# Altium PCB MICROPRESSURE.PcbDoc (part 1 of 2)
Units mm, origin at the board's own origin, x right, y up, seen from the top; angles counter-clockwise.
Board outline 100.09 x 99.96 mm, 2 copper layers (Top Layer, Bottom Layer), stack 1.58 mm thick; 120 components, 61 nets, 315 pads, 444 vias.
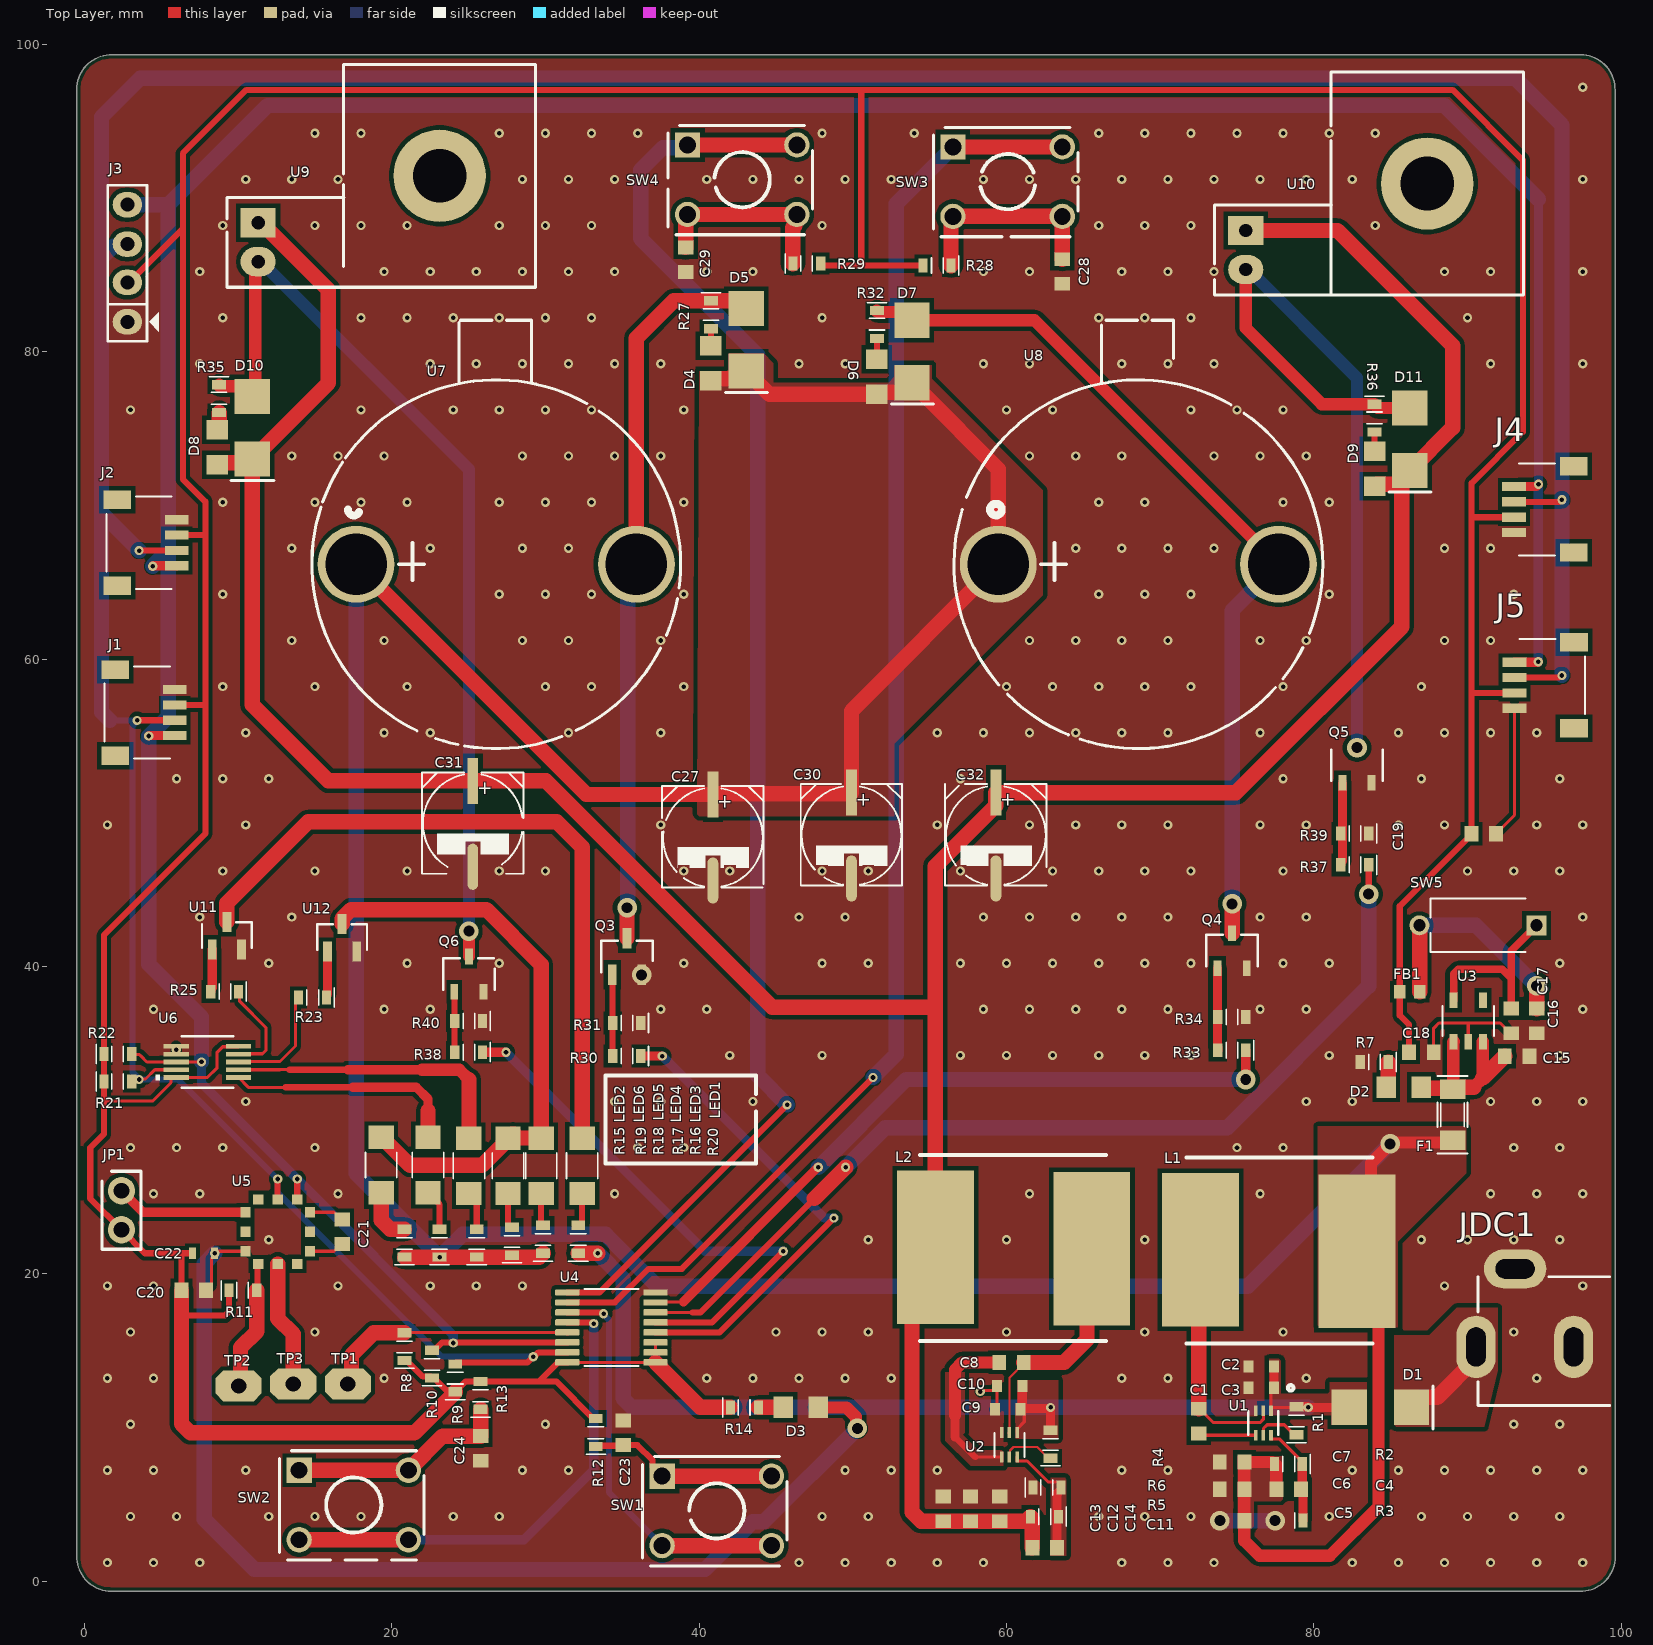
[diagram p0: Top Layer view]
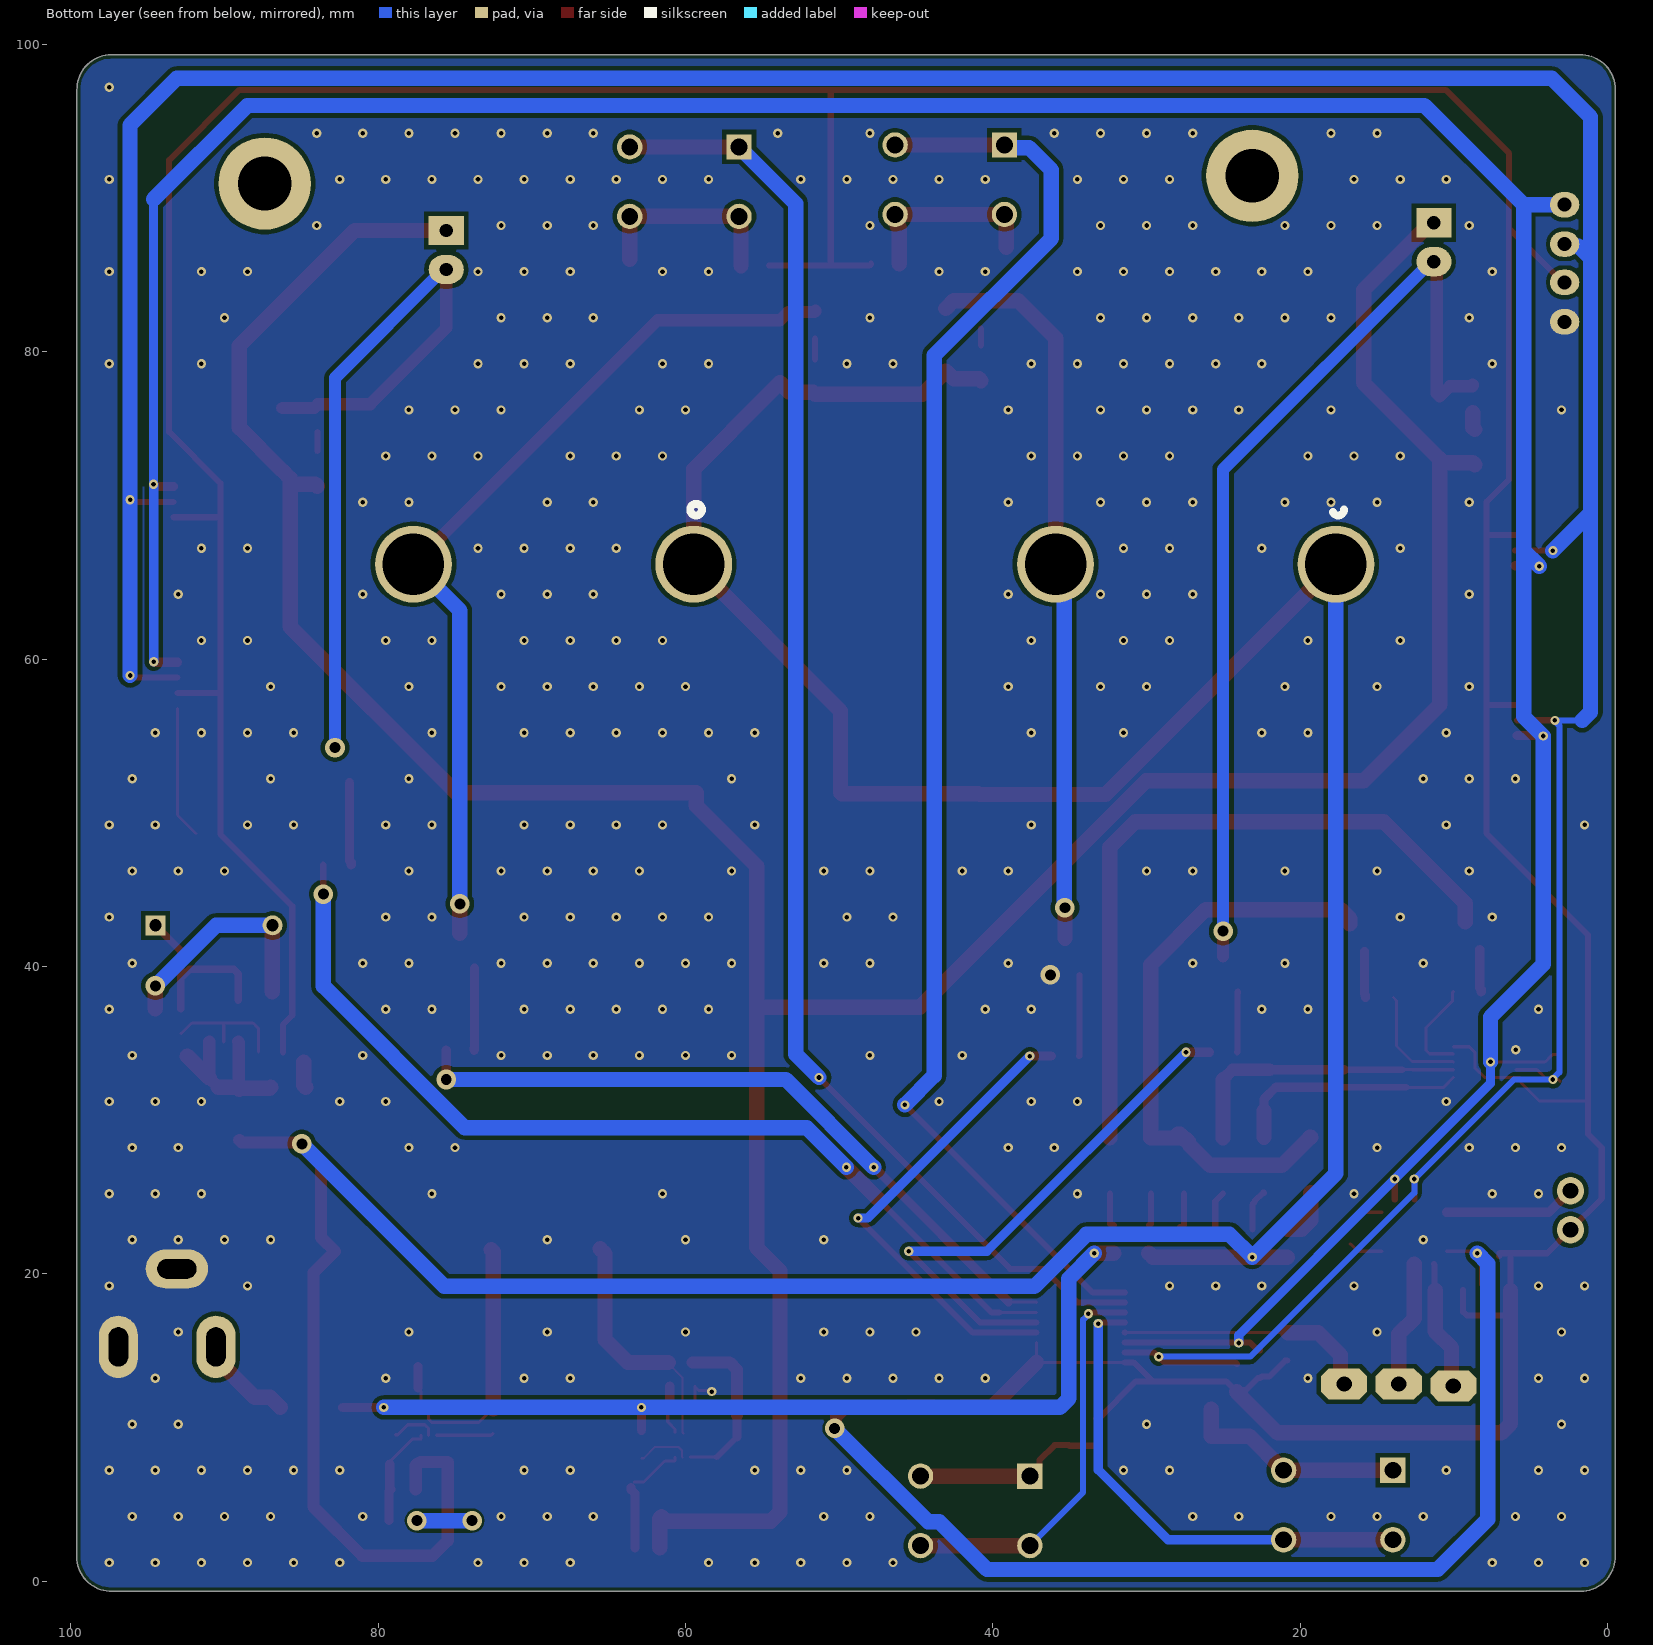
[diagram p1: Bottom Layer view, seen from below]
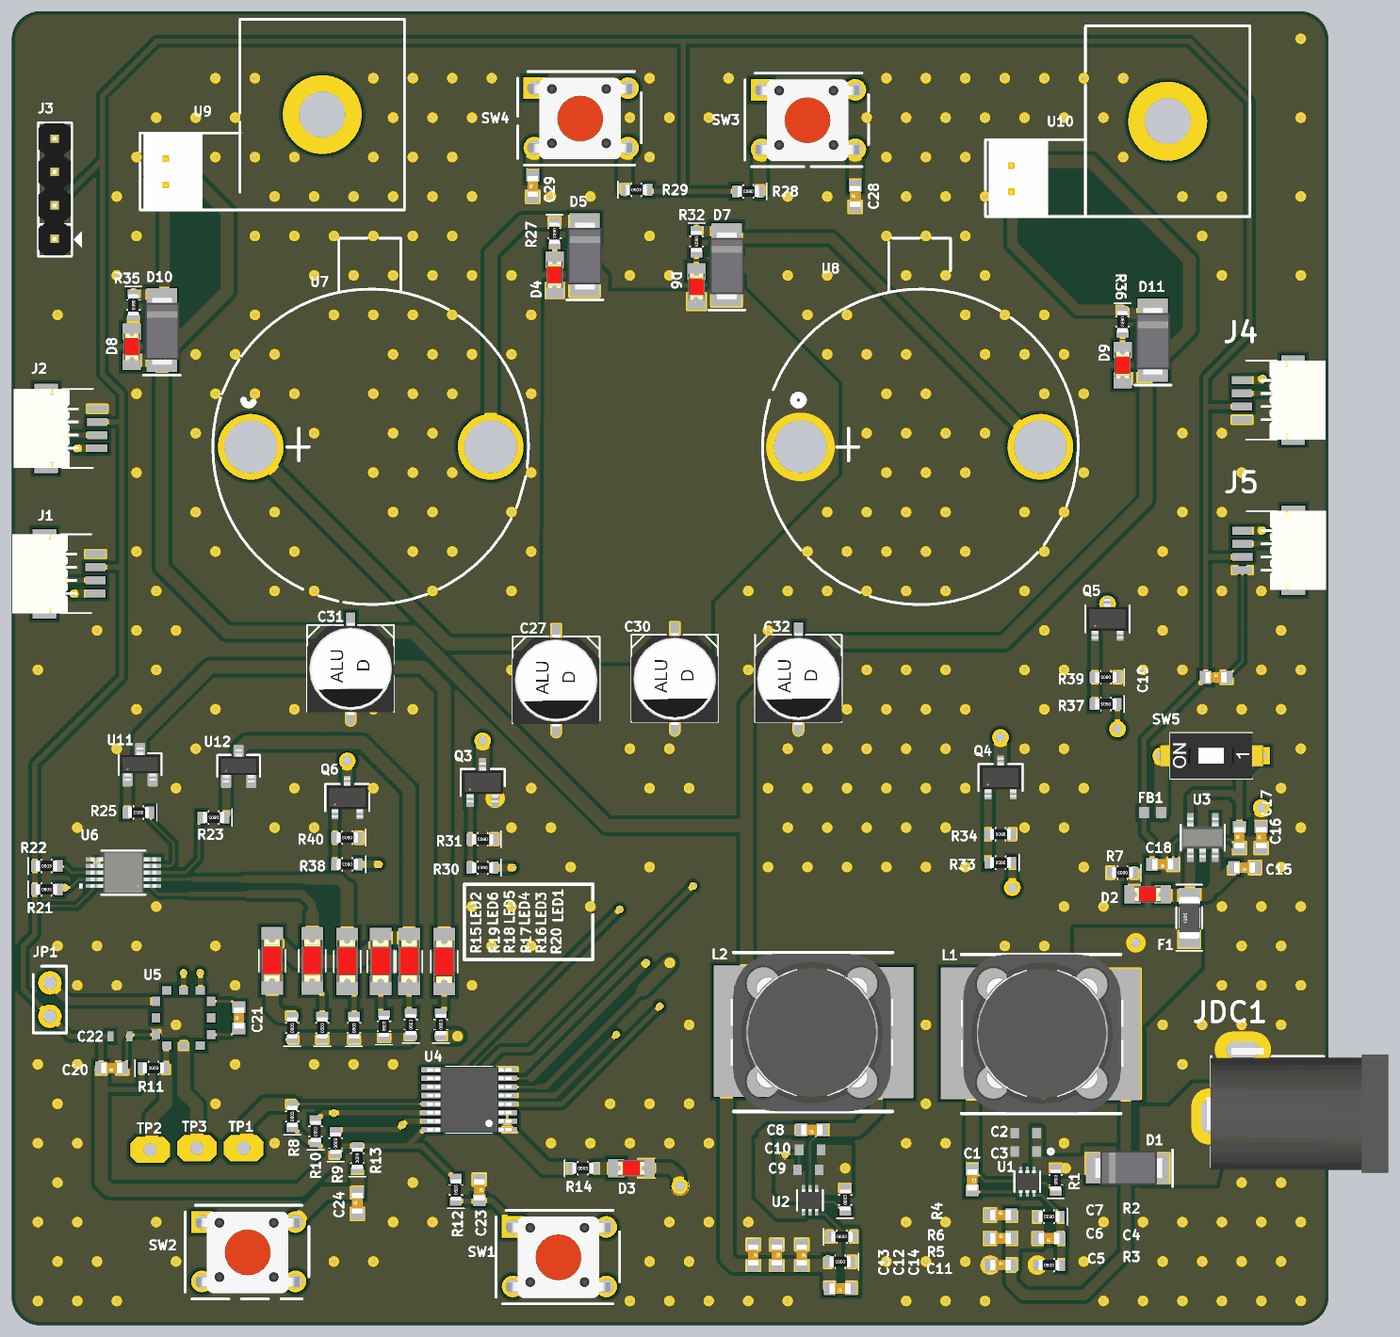
[diagram p2: 3D render of the assembled board from above, using the file's embedded part models]

## Layer stack, top to bottom
Top Solder: solder mask 0.01, SM-001, Dk 4
Top Layer: signal copper 0.035
Dielectric 1: dielectric 1.51, FR-4, Dk 4.8
Bottom Layer: signal copper 0.035
Bottom Solder: solder mask 0.01, SM-001, Dk 4

## Board outline
-0.491,1.639 -0.484,96.889 cw(c1.738,97.08) 1.802,99.309 1.809,99.302 97.172,99.302 cw(c97.362,97.08) 99.592,97.016 99.592,1.766 cw(c97.369,1.576) 97.306,-0.654 97.299,-0.647 1.929,-0.647 cw(c1.738,1.576)

## Design rules (kind name [scope] priority, off if disabled: settings)
BoardOutlineClearance [All] p1: gap=0.25 ignorepadtopadclearanceinfootprint=FALSE
Clearance "Stitching GND" [IsStitchingVia and InNet('GND') vs (IsVia and (Not IsStitchingVia)) Or IsPad] p1: gap=0.23 ignorepadtopadclearanceinfootprint=TRUE
Clearance Clearance_1 [All] p2: gap=0.23 ignorepadtopadclearanceinfootprint=TRUE
ComponentOrientations [All] p1: allowedrotations=1
Creepage [All] p1: checkdistance=0.254 applytopolygonpour=TRUE
HoleSize [All] p1: absolutevalues=TRUE maxlimit=10 minlimit=0.025 maxpercent=80.000 minpercent=20.000
HoleToHoleClearance [All] p1: gap=0.25 allowstackedmicrovias=TRUE
MinimumAnnularRing [All] p1: minimumring=0.1
MinimumSolderMaskSliver [All] p1: minsoldermaskwidth=0.1
NetsToIgnore [All] p1:
PermittedLayers [All] p1: toplayerpermitted=TRUE bottomlayerpermitted=TRUE
PolygonConnect [All] p1: connectstyle=Direct reliefconductorwidth=0.254 reliefentries=4 polygonreliefangle="90 Angle" airgapwidth=0.254
RoutingVias [All] p1: holewidth=0.3 width=0.6 viastyle="Through Hole" minholewidth=0.3 minwidth=0.6 maxholewidth=1.5 maxwidth=3
SilkToSilkClearance [All] p1: silktosilkclearance=0.15
SilkToSolderMaskClearance [IsPad] p1: minsilkscreentomaskgap=0.15 clearancetoexposedcopper=TRUE
SolderMaskExpansion [All] p1: expansion=0.102 istentingtop=FALSE
SupplyNets "Schematic Supply Nets" [InNet('6V')] p1: voltage=0.000
SupplyNets "Schematic Supply Nets_8" [InNet('VIN')] p2: voltage=0.000
SupplyNets "Schematic Supply Nets_7" [InNet('4V5')] p3: voltage=0.000
SupplyNets "Schematic Supply Nets_6" [InNet('4V5A')] p4: voltage=0.000
SupplyNets "Schematic Supply Nets_5" [InNet('3V3')] p5: voltage=0.000
SupplyNets "Schematic Supply Nets_4" [InNet('GND')] p6: voltage=0.000
SupplyNets "Schematic Supply Nets_3" [InNet('+12')] p7: voltage=0.000
SupplyNets "Schematic Supply Nets_1" [InNet('D3V3')] p8: voltage=0.000
Width [All] p1: maxlimit=1 minlimit=0.15 preferedwidth=0.2
25 further rules are at their usual default settings.

## Classes and differential pairs
component class U_POWER: 0.7 C1 C2 C3 C4 C5 C6 C7 C8 C9 C10 C11 C12 C13 C14 C15 C16 C17 C18 C19 D1 D2 F1 FB1 JDC1 L1 L2 R1 R2 R3 R4 R5 R6 R7 SW5 U1 U2 U3
component class U_PERIPHERAL: C27 C30 C31 C32 D4 D5 D6 D7 D8 D9 D10 D11 Q3 Q4 Q5 Q6 R27 R30 R31 R32 R33 R34 R35 R36 R37 R38 R39 R40 U7 U8 U9 U10
component class U_MCU: C20 C21 C22 C23 C24 C28 C29 D3 J1 J2 J3 J4 J5 JP1 LED1 LED2 LED3 LED4 LED5 LED6 R8 R9 R10 R11 R12 R13 R14 R15 R16 R17 R18 R19 R20 R21 R22 R23 R25 R28 R29 SW1 SW2 SW3 SW4 TP1 TP2 TP3 U4 U5 U6 U11 U12

## Components (designator, comment, footprint, x,y, rotation, side; value= is the part's Value field where it differs from the comment)
C1 "100nF" CN-SMD-0603 72.517,10.414 r270 top value=100n
C2 "10uF" CAP_CL10_SAM 76.581,13.97 r0 top
C3 "10uF" CAP_CL10_SAM 76.581,12.573 r0 top value=10u
C4 "100nF" CN-SMD-0603 78.359,5.969 r180 top
C5 "22uF" CN-SMD-0603 74.676,3.937 r0 top value=22u
C6 "22uF" CN-SMD-0603 74.676,5.969 r0 top value=22u
C7 "22uF" CN-SMD-0603 74.676,7.747 r0 top value=22u
C8 "100nF" CN-SMD-0603 60.325,14.224 r180 top value=100n
C9 "10uF" CAP_CL10_SAM 60.071,11.176 r0 top value=10u
C10 "10uF" CAP_CL10_SAM 60.198,12.7 r0 top
C11 "100nF" CN-SMD-0603 62.484,2.159 r180 top value=100n
C12 "22uF" CN-SMD-0603 57.658,4.699 r270 top value=22u
C13 "22uF" CN-SMD-0603 55.88,4.699 r270 top value=22u
C14 "22uF" CN-SMD-0603 59.563,4.699 r270 top
C15 "10u" CN-SMD-0603 93.218,34.163 r180 top
C16 "100n" CN-SMD-0603 92.837,36.449 r90 top
C17 "10u" CN-SMD-0603 94.488,36.449 r90 top
C18 "10u" CN-SMD-0603 86.995,34.417 r180 top
C19 "CAP ALUM 100UF 20% 16V SMD" CN-SMD-0603 91.059,48.641 r0 top value=10uF
C20 "100nF" CN-SMD-0603 7.112,18.923 r180 top
C21 "1nF" CN-SMD-0603 16.764,22.733 r90 top
C22 "100nF" CAP_CL10_SAM-L 7.747,21.336 r180 top
C23 "100nF" CN-SMD-0603 35.052,9.652 r270 top
C24 "100nF" CN-SMD-0603 25.781,8.636 r90 top
C27 "CAP ALUM 100UF 20% 16V SMD" CAP-ALU-SMD-D 40.894,48.387 r270 top value="100u, 16v"
C28 "100nF" CN-SMD-0603 63.627,85.217 r90 top
C29 "100nF" CN-SMD-0603 39.116,85.979 r90 top
C30 "CAP ALUM 100UF 20% 16V SMD" CAP-ALU-SMD-D 49.911,48.514 r270 top value="100u, 16v"
C31 "CAP ALUM 100UF 20% 16V SMD" CAP-ALU-SMD-D 25.273,49.276 r270 top value="100u, 16v"
C32 "CAP ALUM 100UF 20% 16V SMD" CAP-ALU-SMD-D 59.309,48.514 r270 top value="100u, 16v"
D1 "SS34" DIO-SMD-106 84.328,11.303 r0 top
D2 "LED Red" LED-0805-Red 86.995,32.131 r180 top value="LED PWR"
D3 "LED Red" LED-0805-Red 45.466,11.303 r0 top
D4 "LED Red" LED-0805-Red 40.767,80.391 r270 top
D5 "SS34" DIO-SMD-106 43.053,80.772 r270 top
D6 "LED Red" LED-0805-Red 51.562,79.502 r270 top
D7 "SS34" DIO-SMD-106 53.848,80.01 r270 top
D8 "LED Red" LED-0805-Red 8.636,74.93 r270 top
D9 "LED Red" LED-0805-Red 83.947,73.533 r270 top
D10 "SS34" DIO-SMD-106 10.922,75.057 r270 top
D11 "SS34" DIO-SMD-106 86.233,74.295 r270 top
F1 "C1F5" RES-SMD-1206 89.027,30.353 r90 top
FB1 "330" IND_BLM18KG331WH1D_MUR-L 86.233,38.354 r180 top
J1 "PRT-14417" SPARKFUN_PRT-14417 3.429,56.515 r270 top
J2 "PRT-14417" SPARKFUN_PRT-14417 3.556,67.564 r270 top
J3 "Jumper 4" JP4 2.794,84.48 r90 top value=J3
J4 "PRT-14417" SPARKFUN_PRT-14417 95.476,69.729 r90 top
J5 "PRT-14417" SPARKFUN_PRT-14417 95.504,58.293 r90 top
JDC1 "Jac DC 5521" DC0 93.726,17.78 r180 top value="Jac DC"
JP1 "JP2" JP2-CLOSED 2.413,25.4 r0 top value="Connector 2"
L1 "4.7uH" Inductor_SMD 83.804,15.463 r90 top
L2 "4.7uH" Inductor_SMD 54.372,27.717 r270 top value=4.7u
LED1 "LED" LED-1206-Red 32.385,25.222 r90 top value="LED 3 ly Single Colour"
LED2 "LED" LED-1206-Red 19.304,28.88 r270 top value="LED 3 ly Single Colour"
LED3 "LED" LED-1206-Red 29.718,28.829 r270 top value="LED 3 ly Single Colour"
LED4 "LED" LED-1206-Red 27.559,28.829 r270 top value="LED 3 ly Single Colour"
LED5 "LED" LED-1206-Red 25.019,28.829 r270 top value="LED 3 ly Single Colour"
LED6 "LED" LED-1206-Red 22.352,28.88 r270 top value="LED 3 ly Single Colour"
Q3 "AO3400A" SOT-23-3L_AOS 35.306,40.64 r0 top
Q4 "AO3400A" SOT-23-3L_AOS-L 74.676,41.021 r0 top
Q5 "AO3400A" SOT-23-3L_AOS-L 82.804,53.086 r0 top
Q6 "AO3400A" SOT-23-3L_AOS-L 25.019,39.497 r0 top
R1 "RES 100K 5% 1/10W 0603" RES-SMD-0603 78.867,10.414 r90 top value=100K
R2 "197K" RES-SMD-0603 78.359,7.62 r180 top
R3 "30K" RES-SMD-0603 78.359,3.937 r0 top value=30k
R4 "RES 100K 5% 1/10W 0603" RES-SMD-0603 62.865,8.89 r90 top value=100K
R5 "270K" RES-SMD-0603 62.484,4.191 r180 top
R6 "30k" RES-SMD-0603 62.611,6.096 r0 top
R7 "1K" RES-SMD-0603 83.947,33.782 r180 top
R8 "2.2K" RES-SMD-0603 20.828,15.24 r90 top
R9 "4.7K" RES-SMD-0603 24.13,13.208 r90 top
R10 "4.7K" RES-SMD-0603 22.606,14.097 r90 top
R11 "10K" RES-SMD-0603 10.287,18.923 r0 top
R12 "10k" RES-SMD-0603 33.274,9.652 r90 top
R13 "10k" RES-SMD-0603 25.781,12.065 r90 top
R14 "1K" RES-SMD-0603 42.926,11.303 r0 top
R15 "220R" RES-SMD-0603 20.828,21.971 r90 top
R16 "220R" RES-SMD-0603 29.845,22.225 r90 top
R17 "220R" RES-SMD-0603 27.813,22.098 r90 top
R18 "220R" RES-SMD-0603 25.527,21.971 r90 top
R19 "220R" RES-SMD-0603 23.114,21.971 r90 top
R20 "1K" RES-SMD-0603 32.131,22.225 r90 top
R21 "10K" RES-SMD-0603 2.159,32.512 r0 top
R22 "10K" RES-SMD-0603 2.159,34.29 r0 top
R23 "1K" RES-SMD-0603 14.859,37.973 r180 top
R25 "1K" RES-SMD-0603 9.144,38.354 r180 top
R27 "RES 1K 5% 1/10W 0603" RES-SMD-0603 40.767,82.423 r270 top value=1K
R28 "10k" RES-SMD-0603 55.499,85.598 r180 top
R29 "10k" RES-SMD-0603 46.99,85.725 r0 top
R30 "RES 100R 5% 1/10W 0603" RES-SMD-0603 35.306,34.163 r180 top value=100R
R31 "RES 10K 5% 1/10W 0603" RES-SMD-0603 35.306,36.322 r180 top value=10K
R32 "RES 1K 5% 1/10W 0603" RES-SMD-0603 51.562,81.788 r270 top value=1K
R33 "RES 100R 5% 1/10W 0603" RES-SMD-0603 74.676,34.544 r180 top value=100R
R34 "RES 10K 5% 1/10W 0603" RES-SMD-0603 74.676,36.703 r180 top value=10K
R35 "RES 1K 5% 1/10W 0603" RES-SMD-0603 8.763,76.962 r270 top value=1K
R36 "RES 1K 5% 1/10W 0603" RES-SMD-0603 83.947,75.692 r270 top value=1K
R37 "RES 100R 5% 1/10W 0603" RES-SMD-0603 82.677,46.609 r180 top value=100R
R38 "RES 100R 5% 1/10W 0603" RES-SMD-0603 25.019,34.417 r180 top value=100R
R39 "RES 10K 5% 1/10W 0603" RES-SMD-0603 82.677,48.641 r180 top value=10K
R40 "RES 10K 5% 1/10W 0603" RES-SMD-0603 25.019,36.449 r180 top value=10K
SW1 "SW2" "BUTTON 4 PIN" 41.148,4.572 r0 top
SW2 "SW2" "BUTTON 4 PIN" 17.526,4.953 r0 top
SW3 "SW2" "BUTTON 4 PIN" 60.071,91.059 r0 top
SW4 "SW2" "BUTTON 4 PIN" 42.799,91.186 r0 top
SW5 "SW" SW-DIP1 90.678,42.672 r90 top value="SW chip 2 pin"
TP1 "1" "TP - 2" 17.145,12.827 r0 top
TP2 "1" "TP - 2" 10.033,12.7 r0 top
TP3 "1" "TP - 2" 13.589,12.827 r0 top
U1 "TI TPS563203DRLR" SOT_07SDRLR_TEX 76.708,10.287 r270 top
U2 "TI TPS563203DRLR" SOT_07SDRLR_TEX 60.19,8.863 r270 top
U3 "AP2112K-3.3TRG1" SOT_RG1_DIO 90.043,36.449 r90 top value=1K
U4 "TCA9534APWR" SOP65P640X120-16N 34.29,16.51 r180 top
U5 "MPRLS0025PA00001A" XDCR_MPRLS0025PA00001A 12.573,22.733 r0 top
U6 "PCA9632DP2,118" TSSOP10_3P1X3P1_NXP 8.001,33.782 r180 top
U7 "PUMP" Pump 26.797,66.04 r0 top
U8 "PUMP" Pump 68.58,66.04 r0 top
U9 "VALVE" VALVE 23.114,91.44 r0 top
U10 "VALVE2" VALVE 87.376,90.932 r0 top
U11 "BC817-40" SOT23_NEX 9.271,42.037 r0 top
U12 "BC817-40" SOT23_NEX 16.764,41.91 r0 top

## Footprints (in the part's own frame and the unit in brackets; to place one, negate y for a bottom-side part, rotate by r counter-clockwise, add the part's x,y. Pads: shape width x height; smd on the part's side, far side on the other; paste and mask are expansions set on the pad)
"BUTTON 4 PIN" [mil] "BUTTON SMORE 280mil x 178mil"
  rect 65x65 hole 43.31: 1(-140,89)
  round 65 hole 43.31: 1(140,89) 2(-140,-89) 2(140,-89)
  silkscreen extent -190,-141 180,139, body extent -159,-124 153,120, height 276
CAP-ALU-SMD-D [mm]
  rect 3x0.7 smd: 1(-2.794,0)
  oval 3x0.7 smd: 2(2.794,0)
  silkscreen extent -3.35,-3.3 3.25,3.3, body extent -3.5,-3.3 3.5,3.3, height 5.4
CAP_CL10_SAM [mm]
  rect 0.656x0.8 smd paste+0 mask+0: 1(-0.828,0) 2(0.828,0)
CAP_CL10_SAM-L [mm]
  rect 0.452x0.749 smd paste+0 mask+0: 1(-0.726,0) 2(0.726,0)
CN-SMD-0603 [mm]
  rect 0.9x1 smd: 1(-0.8,0) 2(0.8,0)
  body extent -0.8,-0.4 0.8,0.4, height 0.3
DC0 [mil] "Jac DC input"
  oval 100x160 hole 50 slot 100 at 90 deg: 1(125,100) 2(-125,100)
  oval 160x100 hole 50 slot 100 at 0 deg: 3(25,-100)
  silkscreen extent -218,-80 120,250, body extent -410,-105 134,269, height 434
DIO-SMD-106 [mil]
  rect 90x90.55 smd: 1(80,0) 2(-80,0)
  silkscreen extent 135,-55 135,55, body extent -99,-50 106,52, height 95
IND_BLM18KG331WH1D_MUR-L [mm]
  rect 0.76x0.89 smd paste+0 mask+0: 1(-0.647,0) 2(0.647,0)
Inductor_SMD [mm]
  rect 10x5 smd: 1(6.096,11.176) 2(6,1)
  silkscreen extent 0,0 12.1,12.1, body extent 0.1,-0.2 12.1,12.14, height 7.15
JP2-CLOSED [mil]
  round 70 hole 40: 1(0,0) 2(0,-100)
  silkscreen extent -50,-150 50,50, body extent -50,-152 50,50, height 300
JP4 [mil] "Jumper 4"
  oval 65x75 hole 36: 1(-100,0) 2(1,0) 3(99,0) 4(200,0)
  silkscreen extent -150,-81 250,50, body extent -148,-48 248,50, height 323
LED-0805-Red [mil]
  rect 50x55 smd: 1(0,0) 2(90,0)
  body extent 5,-25 85,25, height 43
LED-1206-Red [mil]
  rect 60x65 smd: 1(0,0) 2(142,0)
  silkscreen extent 38,-40 104,40, body extent 7,-31 133,32, height 43
Pump [mm]
  round 5 hole 4: 1(-9.12,0.127) 2(9.12,0.127)
  silkscreen extent -12,-11.87 12,16
RES-SMD-0603 [mm]
  rect 0.6x0.9 smd: 1(-0.889,0) 2(0.927,0)
  silkscreen extent -1.4,-0.64 0.38,0.63, body extent -0.8,-0.4 0.8,0.4, height 0.43
RES-SMD-1206 [mil]
  rect 50x65 smd: 1(-65,0) 2(65,0)
  silkscreen extent -99,-38 99,39, body extent -63,-31 63,32, height 40
SOP65P640X120-16N [mm]
  rrect25% 1.57x0.41 smd: 1(-2.87,2.275) 2(-2.87,1.625) 3(-2.87,0.975) 4(-2.87,0.325) 5(-2.87,-0.325) 6(-2.87,-0.975) 7(-2.87,-1.625) 8(-2.87,-2.275) 9(2.87,-2.275) 10(2.87,-1.625) 11(2.87,-0.975) 12(2.87,-0.325) 13(2.87,0.325) 14(2.87,0.975) 15(2.87,1.625) 16(2.87,2.275)
  silkscreen extent -1.77,-2.5 1.77,2.5, body extent -3.2,-2.5 3.2,2.5, height 1.2
SOT23_NEX [mil]
  rect 22.36x51.56 smd paste+3.86 mask+4: 1(-37.5,-37.21) 2(37.5,-37.21) 3(0,33.36)
  silkscreen extent -64,-32 64,32, body extent -59,-49 59,49, height 43
SOT-23-3L_AOS [mil]
  rect 22x52 smd paste+0 mask+0: 1(-37.5,-47) 2(37.5,-47) 3(0,47)
  silkscreen extent -66,-40 66,40, body extent -61,-59 61,59, height 49
SOT-23-3L_AOS-L [mil]
  rect 20x40 smd paste+0 mask+0: 1(-37.5,-45) 2(37.5,-45) 3(0,45)
  silkscreen extent -66,-40 66,40, body extent -61,-59 61,59, height 49
SOT_07SDRLR_TEX [mm]
  rect 0.706x0.229 smd paste+0 mask+0: 1(-0.798,0.5) 2(-0.798,0) 3(-0.798,-0.5) 4(0.798,-0.5) 5(0.798,0) 6(0.798,0.5)
  silkscreen extent -0.77,-0.98 0.77,0.98, body extent -0.85,-0.85 0.85,0.85, height 0.61
SOT_RG1_DIO [mil]
  rect 39.5x20 smd paste+0 mask+0: 1(-53.25,37.4) 2(-53.25,0) 3(-53.25,-37.4) 4(53.25,-37.4) 5(53.25,37.4)
  silkscreen extent -39,-66 39,66, body extent -59,-61 59,61, height 51
SPARKFUN_PRT-14417 [mm]
  rect 0.6x1.55 smd: 1(-1.5,2.45) 2(-0.5,2.45) 3(0.5,2.45) 4(1.5,2.45)
  rect 1.2x1.8 smd: S1(-2.8,-1.425) S2(2.8,-1.425)
  silkscreen extent -3,-2.12 3,2.12, body extent -3,-3.9 3,1.05, height 3.25
SW-DIP1 [mm]
  rect 1.3x1.3 hole 0.8: 1(0,-3.81)
  round 1.3 hole 0.8: 2(0,3.81)
  silkscreen extent -1.74,-3.1 1.74,3.1, body extent -1.74,-3.98 1.74,3.89, height 3.95
"TP - 2" [mm] "TestPoint"
  oct 3x2 hole 1: 1(0,0)
TSSOP10_3P1X3P1_NXP [mil]
  rect 64.56x12 smd paste+0 mask+0: 1(-80,40) 2(-80,20) 3(-80,0) 4(-80,-20) 5(-80,-40) 6(80,-40) 7(80,-20) 8(80,0) 9(80,20) 10(80,40)
  silkscreen extent -66,-66 132,66, body extent -99,-61 99,61, height 43
VALVE [mil]
  rect 90x75 hole 34: 1(-465,-120)
  oval 90x75 hole 34: 2(-465,-220)
  round 236.22 hole 137.8 unplated: 3(0,0)
  silkscreen extent -545,-285 246,285, body extent -535,-288 -358,-52, height 236
XDCR_MPRLS0025PA00001A [mm]
  rect 0.7x0.65 smd: 1(-1.27,2.1) 2(0,2.1) 3(1.27,2.1) 7(1.27,-2.1) 8(0,-2.1) 9(-1.27,-2.1)
  rect 0.65x0.7 smd: 4(2.1,1.27) 5(2.1,0) 6(2.1,-1.27) 10(-2.1,-1.27) 11(-2.1,0) 12(-2.1,1.27)

## Part data
C1 C8: library part "CAPCER0001 100nF 10% 50V X7R 0603 SMD_1", "CAP CER 100nF 10% 50V X7R 0603 SMD", CERTIFICATION=NA, CLASS=B, ComponentLink1Description=Datasheet, ComponentLink1URL=https://datasheet.lcsc.com/lcsc/1811021431_Samsung-Electro-Mechanics-CL10B104KB8NNNC_C1591.pdf, LINE=SMT, MOUNT=SMD, TMG CODE=None, TMG PN=CAPCER0001, TYPE=EP, UNIT=PCS
C2 C3 C9 C10: library part CL10A106MQ8NNNC, "Description", Manufacturer_Name=Samsung, Copyright="Copyright (C) 2026 Ultra Librarian. All rights reserved.", Manufacturer_Part_Number=CL10A106MQ8NNNC
C4 C11 C20 C22 C23 C24 C28 C29: library part "CAPCER0001 100nF 10% 50V X7R 0603 SMD", "CAP CER 100nF 10% 50V X7R 0603 SMD", CERTIFICATION=NA, CLASS=B, ComponentLink1Description=Datasheet, ComponentLink1URL=https://datasheet.lcsc.com/lcsc/1811021431_Samsung-Electro-Mechanics-CL10B104KB8NNNC_C1591.pdf, LINE=SMT, MOUNT=SMD, TMG CODE=None, TMG PN=CAPCER0001, TYPE=EP, UNIT=PCS
C5 C6 C7 C12 C13 C14: library part GRM188R60J226MEA0D, "Description", Manufacturer_Name=Murata, Copyright="Copyright (C) 2026 Ultra Librarian. All rights reserved.", Manufacturer_Part_Number=GRM188R60J226MEA0D
C15 C17 C18: library part GMC10X7R106K10NT, "CAP0603 X7R 10UF 10% 10V", Capacitance="10 µF", Device Package="0603 (1608 Metric)", Manufacturer="Cal-Chip Electronics, Inc.", Operating Temperature="-55°C ~ 125°C", Supplier Part Number 1=4713-GMC10X7R106K10NTCT-ND, Temperature Coefficient=X7R, Tolerance=±10%, Voltage - Rated=10V, Applications="General Purpose", ComponentLink1Description=Datasheet, ComponentLink1URL=https://88ce57.p3cdn1.secureserver.net/wp-content/uploads/2023/01/gmc_series-2.pdf, ComponentLink2Description="DigiKey Link", ComponentLink2URL=https://www.digikey.com/en/products/detail/cal-chip-electronics-inc/GMC10X7R106K10NT/18151126, lastupdated="2/9/2024 8:09:39 PM", Lifecycle Status=Active, Minimum Order=1, Mounting Type="Surface Mount, MLCC", Package / Case="0603 (1608 Metric)", Packaging=TapeAndReel, Part Number=GMC10X7R106K10NT, Part Status=Active, partid=49835, price=0.26, series=GMC, Size / Dimension="0.063\" L x 0.031\" W (1.60mm x 0.80mm)", Supplier 1=DigiKey, Thickness (Max)="0.039\" (1.00mm)"
C16: library part GMC10X7R106K10NT, "CAP0603 X7R 100nF 10% 10V", Capacitance="10 µF", Device Package="0603 (1608 Metric)", Manufacturer="Cal-Chip Electronics, Inc.", Operating Temperature="-55°C ~ 125°C", Supplier Part Number 1=4713-GMC10X7R106K10NTCT-ND, Temperature Coefficient=X7R, Tolerance=±10%, Voltage - Rated=10V, Applications="General Purpose", ComponentLink1Description=Datasheet, ComponentLink1URL=https://88ce57.p3cdn1.secureserver.net/wp-content/uploads/2023/01/gmc_series-2.pdf, ComponentLink2Description="DigiKey Link", ComponentLink2URL=https://www.digikey.com/en/products/detail/cal-chip-electronics-inc/GMC10X7R106K10NT/18151126, lastupdated="2/9/2024 8:09:39 PM", Lifecycle Status=Active, Minimum Order=1, Mounting Type="Surface Mount, MLCC", Package / Case="0603 (1608 Metric)", Packaging=TapeAndReel, Part Number=GMC10X7R106K10NT, Part Status=Active, partid=49835, price=0.26, series=GMC, Size / Dimension="0.063\" L x 0.031\" W (1.60mm x 0.80mm)", Supplier 1=DigiKey, Thickness (Max)="0.039\" (1.00mm)"
C19: library part UWT1C101MCL1GB, "CAP ALUM 100UF 20%  / 16V SMD", Supplier Part Number 1=493-2177-2-ND, Supplier 1=Digi-Key
C21: library part GCJ188R71H102KA01D, "No Description Available", Manufacturer_Name=Murata, Copyright="Copyright (C) 2026 Ultra Librarian. All rights reserved.", Manufacturer_Part_Number=GCJ188R71H102KA01D, TYPE="Ceramic Capacitors"
C27 C30 C31 C32: library part UWT1C101MCL1GB, Supplier Part Number 1=493-2177-2-ND, Supplier 1=Digi-Key
D1 D5 D7 D10 D11: "Schottky Diode 40V 3A SMA", Supplier Part Number 1=SS34-E3/57TGICT-ND, Supplier 1=Digi-Key
D2 D3 D4 D6 D8 D9: library part LTST-C190KRKT, "Lite-On LED Red 0603", Supplier Part Number 1=160-1436-1-ND, Supplier 1=Digi-Key, Supplier Part Number 2=FL1413
F1: "Fuse Chip Fast Acting 5A 125V SMD Solder Pad 1206 3.2 X 1.58 X 0.63mm", Case Code (Imperial)=1206, Case Code (Metric)=3216, DC Cold Resistance=20mR, Manufacturer="Bel TRP", Max Operating Temperature=125°C, Min Operating Temperature=-55°C, Supplier Part Number 1=48AC8480, Voltage Rating=125V, Voltage Rating (DC)=63V, Case/Package=1206, Category=Uncategorized, ComponentLink1Description=http://www.mouser.com/ds/2/643/C1F-594910.pdf?src-supplier=Mouser, ComponentLink1URL=http://www.mouser.com/ds/2/643/C1F-594910.pdf?src-supplier=Mouser, ComponentLink2Description=http://belfuse.com/pdfs/C1F.pdf?src-supplier=Avnet, ComponentLink2URL=http://belfuse.com/pdfs/C1F.pdf?src-supplier=Avnet, ComponentLink3Description=https://belfuse.com/resources/datasheets/circuitprotection/ds-cp-c1f-series.pdf?src-supplier=Digikey, ComponentLink3URL=https://belfuse.com/resources/datasheets/circuitprotection/ds-cp-c1f-series.pdf?src-supplier=Digikey, Contact Plating=Tin, Fuse Type="Board Mount (Cartridge Style Excluded)", Manufacturer Part Number=C1F5, MOUNT="Surface Mount", Number of Pins=2, Packaging="Cut Tape", RoHS=Yes, series=C1F, Supplier 1=Newark, Voltage Rating (AC)=125V
FB1: library part BLM18KG331SH1D, "FERRITE BEAD 330 OHM 0603 1LN", Current Rating (Max)=1.7A, DC Resistance (DCR) (Max)=80mOhm, Device Package="0603 (1608 Metric)", Impedance @ Frequency="330 Ohms @ 100 MHz", Manufacturer="Murata Electronics", Operating Temperature="-55°C ~ 125°C", Ratings=AEC-Q200, Supplier Part Number 1=490-13257-1-ND, ComponentLink1Description=Datasheet, ComponentLink1URL=https://www.murata.com/en-global/products/productdata/8796737273886/QNFA9101.pdf, ComponentLink2Description="DigiKey Link", ComponentLink2URL=https://www.digikey.com/en/products/detail/murata-electronics/BLM18KG331SH1D/5881246, Filter Type="Power Line", Height (Max)="0.037\" (0.95mm)", lastupdated="3/11/2024 7:43:28 AM", Lifecycle Status=Active, Minimum Order=1, Mounting Type="Surface Mount", Number of Lines=1, Package / Case="0603 (1608 Metric)", Packaging=TapeAndReel, Part Number=BLM18KG331SH1D, Part Status=Active, partid=932, price=0.02, series="EMIFIL®, BLM18", Size / Dimension="0.063\" L x 0.032\" W (1.60mm x 0.80mm)", Supplier 1=DigiKey
J1 J2 J4 J5: "QWIIC JST CONNECTOR - SMD 4-PIN", Package=None, Check_prices=https://www.snapeda.com/parts/PRT-14417/SparkFun+Electronics/view-part/?ref=eda, MF="SparkFun Electronics", MP=PRT-14417, SnapEDA_Link=https://www.snapeda.com/parts/PRT-14417/SparkFun+Electronics/view-part/?ref=snap
J3: library part JP4, "Jumper 3"
JDC1: library part DCIN, "Jac DC input"
JP1: library part Con2, "jumper 2.0 B"
L1 L2: library part "INDMOI0016 1W2T 2.2uH 20% 5A 0420 SMD", "IND MOI 1W2T 4.7uH 20% 5A 0420 SMD", CERTIFICATION=NA, CLASS=B, ComponentLink1Description=Datasheet, ComponentLink1URL=https://datasheet.lcsc.com/lcsc/2305161117_cjiang--Changjiang-Microelectronics-Tech-FXL0420-2R2-M_C167206.pdf, LINE=SMT, MOUNT=SMD, TMG CODE=None, TYPE=EP, UNIT=PCS
LED1 LED2 LED3 LED4 LED5 LED6: "LED Single colour Green and Red"
Q3 Q4 Q5 Q6: library part IRFML8244TRPBF, "MOSFET N-CH 25V 5.8A SOT23", Supplier Part Number 1=IRFML8244TRPBFCT-ND, Supplier 1=Digi-Key
R1 R4: library part RC0603JR-07100KL, "Yageo RES 100K 5% 1/10W 0603", Supplier Part Number 1=311-100KGRCT-ND, Supplier 1=Digi-Key, Supplier Part Number 2=FL2402
R2 R3 R5 R6: library part "RESCHP0195 2K7 1% 0603 SMD", "RES CHP 2K7 1% 1/10W 0603 SMD", CERTIFICATION=NA, CLASS=B, ComponentLink1Description=Datasheet, ComponentLink1URL=https://datasheet.lcsc.com/lcsc/2304140030_YAGEO-RC0603FR-072K7L_C114612.pdf, LINE=SMT, MOUNT=SMD, TMG CODE=None, TMG PN=RESCHP0195, TYPE=EP, UNIT=PCS
R7: library part "Resistor 2.2K", "Res Thick Film 0603 2.2K Ohm 5% 1/10W ±200ppm/°C Molded SMD SMD Paper T/R", Case Code (Imperial)=0603, Case Code (Metric)=1608, Manufacturer=Vishay, Manufacturer Part Number=CRCW06032K20JNEA, Max Operating Temperature=155°C, Max Power Dissipation=100mW, Min Operating Temperature=-55°C, Package Quantity=5000, Ratings=AEC-Q200, Resistance=2.2kR, Resistance Tolerance=5%, Resistor Type="Thick Film", Temperature Coefficient=200ppm/°C, Voltage Rating=75V, Case/Package=0603, Category="Chip SMD Resistors", ComponentLink1Description=https://datasheet.ciiva.com/2462/dcrcwe3-2462048.pdf?src-supplier=Digikey, ComponentLink1URL=https://datasheet.ciiva.com/2462/dcrcwe3-2462048.pdf?src-supplier=Digikey, ComponentLink2Description=https://datasheet.ciiva.com/16767/70201119-16767464.pdf?src-supplier=Allied+Electronics, ComponentLink2URL=https://datasheet.ciiva.com/16767/70201119-16767464.pdf?src-supplier=Allied+Electronics, ComponentLink3Description=https://datasheet.ciiva.com/2462/dcrcwe3-2462046.pdf?src-supplier=Digikey, ComponentLink3URL=https://datasheet.ciiva.com/2462/dcrcwe3-2462046.pdf?src-supplier=Digikey, ComponentLink4Description=https://datasheet.ciiva.com/5541/dcrcwe3-109170-5541959.pdf?src-supplier=Mouser, ComponentLink4URL=https://datasheet.ciiva.com/5541/dcrcwe3-109170-5541959.pdf?src-supplier=Mouser, ComponentLink5Description=https://datasheet.ciiva.com/16286/dcrcwe3-16286997.pdf?src-supplier=Future+Electronics, ComponentLink5URL=https://datasheet.ciiva.com/16286/dcrcwe3-16286997.pdf?src-supplier=Future+Electronics, Construction=Rectangular, Contact Plating=Tin, Depth=0.85mm, Features="Automotive AEC-Q200", Height=0.45mm, Lead Free=5697LeadFree, Length=1.55mm, Military Standard=Not, Number of Terminations=2, Packaging="Tape and Reel", Power Rating=100mW, Pricing 1="5000=0.0053 (USD)", Radiation Hardening=No, Reach SVHC Compliant=Unknown, RoHS=Yes, RoHS Compliant=Yes, series=CRCW, Size Code=0603, Stock 1=130000, Supplier 1="Arrow Electronics", Supplier Part Number 1=CRCW06032K20JNEA, Termination=SMD/SMT, Tolerance=5%, Weight=7.1E-05oz, Width=0.85mm
R8 R9 R10 R11 R12 R13 R14 R28 R29: library part "RESCHP0428 8K4 1% 0603 SMD", "RES CHP 8K4 1% 1/10W 0603 SMD", CERTIFICATION=NA, CLASS=B, ComponentLink1Description=Datasheet, ComponentLink1URL=https://datasheet.lcsc.com/lcsc/2304140030_YAGEO-RT0603FRD07100RL_C160603.pdf, LINE=SMT, MOUNT=SMD, TMG CODE=None, TYPE=EP, UNIT=PCS
R15 R16 R17 R18 R19 R20 R21 R22 R23 R25: library part Res-SMD, "Resistor", Manufacturer="Generic Components", CLASS=Passive, Published=08/06/2000, Publisher="Altium Hobart Technology Centre"
R27 R32 R35 R36: library part RC0603JR-071KL, "Yageo RES 1K 5% 1/10W 0603", Supplier Part Number 1=C131707, Supplier 1=LCSC
R30 R33 R37 R38: library part RC0603JR-07100RL, "Yageo RES 100R 5% 1/10W 0603", Supplier Part Number 1=311-100GRCT-ND, Supplier 1=Digi-Key, Supplier Part Number 2=FL2438
R31 R34 R39 R40: library part RC0603JR-0710KL, "Yageo RES 10K 5% 1/10W 0603", Supplier Part Number 1=311-10KGRCT-ND, Supplier 1=Digi-Key, Supplier Part Number 2=FL2403
SW1 SW2 SW3 SW4: "Switch button 4 pin"
SW5: library part SW2, "Switch button 2 pin"
TP1 TP2 TP3: library part TP, "CONNECT 1"
U1 U2: library part "ICSOCV0021 BCK TPS563201 3A SOT23-6 SMD", "ICS OCV BCK TPS563201 3A SOT23-6 SMD", CERTIFICATION=NA, CLASS=B, ComponentLink1Description=Datasheet, ComponentLink1URL=https://datasheet.lcsc.com/lcsc/2304241919_Texas-Instruments-TPS563201DDCR_C116592.pdf, LINE=SMT, MOUNT=SMD, TMG CODE=None, TYPE=EP, UNIT=PCS
U3: "AP2112 Series 0.6 A 3.3 V Fixed Output SMT LDO Linear Regulator - SOT23-5", Package="SOT-753 Diodes Inc.", Availability=Unavailable, MF="Diodes Inc.", MP=AP2112K-3.3TRG1, price=None, SnapEDA_Link=https://www.snapeda.com/parts/AP2112K-3.3TRG1/Diodes%20Inc./view-part/?ref=snap
U4: "8-bit 1.65- to 5.5-V I2C/SMBus I/O expander with interrupt, & config registers", Package="TSSOP-16 Texas Instruments", Check_prices=https://www.snapeda.com/parts/TCA9534APWR/Texas+Instruments/view-part/?ref=eda, MF="Texas Instruments", MP=TCA9534APWR, SnapEDA_Link=https://www.snapeda.com/parts/TCA9534APWR/Texas+Instruments/view-part/?ref=snap
U5: "Pressure Sensor 25PSI _172.37kPa_ Absolute Male - 0.1 _2.5mm_ Tube 24 b 12-SMD Module", Package="SMD-10 Honeywell", Digi-Key_Part_Number=480-7098-1-ND, MF="Honeywell Sensing", MP=MPRLS0025PA00001A, SnapEDA_Link=https://www.snapeda.com/parts/MPRLS0025PA00001A/Honeywell%20Sensing%20and%20Productivity%20Solutions/view-part/2772767/?ref=snap
U6: "No Description Available", Manufacturer_Name=NXP, Copyright="Copyright (C) 2026 Ultra Librarian. All rights reserved.", Manufacturer_Part_Number=PCA9632DP2,118, RefDes=RefDes, TYPE=Type
U7 U8 U9 U10: library part A5F083, "Connector Header 2 Position 6.35mm Solder Straight Thru-Hole 2 Terminal 1 Port MLX-Series", Color=Natural, Contact Resistance=3.5mΩ, Current Rating=13.5A, Dielectric Material=Polyester, Flammability Rating="UL94 V-2", Insulation Resistance=1GΩ, Manufacturer=Molex, Manufacturer Lifecycle Status=ACTIVE, Manufacturer Part Number=10-84-4022, Max Operating Temperature=105°C, Min Operating Temperature=-55°C, Operating Force=6.672N, Supplier Part Number 1=0010844022, Voltage Rating=600V, Category="Headers and Wire Housings", China RoHS=Compliant, ComponentLink1Description=https://datasheet.octopart.com:443/10-84-4022-Molex-datasheet-137053637.pdf?src-supplier=element14+APAC, ComponentLink1URL=https://datasheet.octopart.com:443/10-84-4022-Molex-datasheet-137053637.pdf?src-supplier=element14+APAC, ComponentLink2Description=https://datasheet.octopart.com:443/10-84-4022-Molex-datasheet-13791970.pdf?src-supplier=Molex, ComponentLink2URL=https://datasheet.octopart.com:443/10-84-4022-Molex-datasheet-13791970.pdf?src-supplier=Molex, ComponentLink3Description=https://sigma.octopart.com:443/16272272/technical_drawing/Molex-10-84-4022.pdf?src-supplier=Molex, ComponentLink3URL=https://sigma.octopart.com:443/16272272/technical_drawing/Molex-10-84-4022.pdf?src-supplier=Molex, ComponentLink4Description=https://datasheet.octopart.com:443/010844022-Molex-datasheet-5390850.pdf?src-supplier=Molex, ComponentLink4URL=https://datasheet.octopart.com:443/010844022-Molex-datasheet-5390850.pdf?src-supplier=Molex, ComponentLink5Description=https://datasheet.octopart.com:443/10-84-4022-Molex-datasheet-154742841.pdf?src-supplier=Master+Electronics, ComponentLink5URL=https://datasheet.octopart.com:443/10-84-4022-Molex-datasheet-154742841.pdf?src-supplier=Master+Electronics, ComponentLink6Description=https://datasheet.octopart.com:443/10-84-4022-Molex-datasheet-33343972.pdf?src-supplier=Electro+Sonic, ComponentLink6URL=https://datasheet.octopart.com:443/10-84-4022-Molex-datasheet-33343972.pdf?src-supplier=Electro+Sonic, ComponentLink7Description=https://datasheet.octopart.com:443/10-84-4022-Molex-datasheet-21205596.pdf?src-supplier=Electro+Sonic, ComponentLink7URL=https://datasheet.octopart.com:443/10-84-4022-Molex-datasheet-21205596.pdf?src-supplier=Electro+Sonic, ComponentLink8Description=https://datasheet.octopart.com:443/10-84-4022-Molex-datasheet-62102692.pdf?src-supplier=Electro+Sonic, ComponentLink8URL=https://datasheet.octopart.com:443/10-84-4022-Molex-datasheet-62102692.pdf?src-supplier=Electro+Sonic, ComponentLink9Description=https://datasheet.octopart.com:443/10-84-4022-Molex-datasheet-140174504.pdf?src-supplier=RS+(Formerly+Allied+Electronics), ComponentLink9URL=https://datasheet.octopart.com:443/10-84-4022-Molex-datasheet-140174504.pdf?src-supplier=RS+(Formerly+Allied+Electronics), ComponentLink10Description=https://datasheet.octopart.com:443/10-84-4022-Molex-datasheet-120134962.pdf?src-supplier=RS+(Formerly+Allied+Electronics), ComponentLink10URL=https://datasheet.octopart.com:443/10-84-4022-Molex-datasheet-120134962.pdf?src-supplier=RS+(Formerly+Allied+Electronics), ComponentLink11Description=https://datasheet.octopart.com:443/10-84-4022-Molex-datasheet-32867450.pdf?src-supplier=Newark, ComponentLink11URL=https://datasheet.octopart.com:443/10-84-4022-Molex-datasheet-32867450.pdf?src-supplier=Newark, ComponentLink12Description=https://datasheet.octopart.com:443/10844022-Molex-datasheet-8320017.pdf?src-supplier=Jameco, ComponentLink12URL=https://datasheet.octopart.com:443/10844022-Molex-datasheet-8320017.pdf?src-supplier=Jameco, ComponentLink13Description=https://datasheet.octopart.com:443/10-84-4022-Molex-datasheet-5314522.pdf?src-supplier=Verical, ComponentLink13URL=https://datasheet.octopart.com:443/10-84-4022-Molex-datasheet-5314522.pdf?src-supplier=Verical, ComponentLink14Description=https://datasheet.octopart.com:443/10-84-4022-Molex-datasheet-27226.pdf?src-supplier=DigiKey, ComponentLink14URL=https://datasheet.octopart.com:443/10-84-4022-Molex-datasheet-27226.pdf?src-supplier=DigiKey, ComponentLink15Description=http://sigma.octopart.com:80/16272275/rohs_statement/Molex-10-84-4022.pdf?src-supplier=Compliance+Statements, ComponentLink15URL=http://sigma.octopart.com:80/16272275/rohs_statement/Molex-10-84-4022.pdf?src-supplier=Compliance+Statements, ComponentLink16Description=http://sigma.octopart.com:80/reach_statement/Molex-company-74.pdf?src-supplier=Compliance+Statements, ComponentLink16URL=http://sigma.octopart.com:80/reach_statement/Molex-company-74.pdf?src-supplier=Compliance+Statements, ComponentLink17Description=http://sigma.octopart.com:80/rohs_statement/Molex-company-73.pdf?src-supplier=Compliance+Statements, ComponentLink17URL=http://sigma.octopart.com:80/rohs_statement/Molex-company-73.pdf?src-supplier=Compliance+Statements, ComponentLink18Description=http://sigma.octopart.com:80/conflict_mineral_statement/Molex-company-72.pdf?src-supplier=Compliance+Statements, ComponentLink18URL=http://sigma.octopart.com:80/conflict_mineral_statement/Molex-company-72.pdf?src-supplier=Compliance+Statements, Connector Type=Power, Contact Gender=Female, Contact Material=Bronze, Contact Plating=Tin, Country of Origin=US, Gender=Female, Glow Wire Compliant=Non-compliant, Halogen Free="Low Halogen", Housing Material=Nylon, Lead Free="Lead Free", Lifecycle Status=Production, MOUNT="Through Hole", Number of Circuits=2, Number of Contacts=2, Number of Pins=2, Number of Positions=2, Number of Rows=1, Orientation=Vertical, Packaging=Carton, Pitch=6.35mm, Plating=Tin, Plating Thickness=3.5052µm, Pricing 1="1=0,2907, 10=0,267, 100=0,245, 500=0,229, 1836=0,216 (USD)", Radiation Hardening=No, REACH SVHC=Yes, RoHS=Compliant, Schedule B="8536694040, 8536694040|8536694040|8536694040|8536694040|8536694040", Shell Material=POLYAMIDE66, Stock 1=4724, Supplier 1="Arrow Electronics", Terminal Pitch=6.35mm, Termination=Solder
U11 U12: "No Description Available", Manufacturer_Name=Nexperia, Copyright="Copyright (C) 2026 Ultra Librarian. All rights reserved.", Manufacturer_Part_Number=BC817-40, RefDes=RefDes, TYPE=Type

## Via types
v1: diameter 0.6, hole 0.3, Top Layer to Bottom Layer, 432 vias
v2: diameter 1.27, hole 0.711, Top Layer to Bottom Layer, 12 vias

## Nets (pads, with @x,y where several pads share a name; then routed paths per layer and width w, separated by ;. In a path a pad name is that pad's centre, name@x,y a point inside that pad or via, vN(x,y) a via of type N, cw(c..) or ccw(c..) an arc to the next point about the centre after c; other vN are vias at no path point)
3V3: C16.2 SW5.1 U3.5 | length 11.9
  Top Layer w0.5: U3.5 89.093,39.524 89.386,39.817 92.263,39.817 92.837,39.243 ; C16.2 92.837,39.243 ; SW5.1 92.837,41.021 92.837,39.243
4V5: C4.2 C5.2 C6.2 C7.2 C27.1 C30.1 D4.2 D5.1 D6.2 D7.1 F1.1 L1.2 R2.2 R15.1 R16.1 R17.1 R18.1 R19.1 U7.1 U8.1 | length 258.4
  Top Layer w0.8: C4.2 77.559,7.543 77.482,7.62 R2.2 77.382,7.62 77.255,7.747 C7.2 C6.2 C5.2 75.476,2.629 76.454,1.651 81.026,1.651 84.201,4.826 84.201,20.066 L1.2 83.709,22.368 83.709,27.194 v2(84.963,28.448) 85.053,28.538 88.863,28.538 F1.1
  Top Layer w1: U7.1 32.663,51.181 C27.1 40.957,51.244 49.847,51.244 C30.1 49.911,56.618 U8.1 59.46,72.366 54.498,77.328 54.498,77.335 53.855,77.978 D7.1 53.221,77.351 51.697,77.351 D6.2 ; R15.1 v1(23.114,21.082) R18.1 29.591,21.082 R16.1 ; D4.2 40.902,78.24 42.553,78.24 D5.1 43.06,78.74 43.703,78.097 43.703,78.09 44.577,77.216 D6.2@51.498,77.216
  Bottom Layer w1: U7.1 17.677,26.519 v1(23.114,21.082) 24.598,22.566 33.91,22.566 37.298,19.178 75.693,19.178 v2(84.963,28.448)
4V5A: C15.2 D2.1 F1.2 U3.1 U3.3 | length 11.8
  Top Layer w0.8: F1.2 89.06,32.037 89.06,35.063 U3.1 ; 90.394,32.139 90.993,32.738 U3.3
  Top Layer w1: D2.1 87.059,32.067 88.963,32.067 F1.2 ; F1.2@89.06,32.037 89.162,32.139 90.394,32.139 ; 90.993,32.738 C15.2
6V: C11.2 C12.2 C13.2 C14.2 C31.1 C32.1 D8.2 D9.2 D10.1 D11.1 L2.2 R5.2 U9.1 U10.1 | length 218.3
  Top Layer w1: D8.2 8.771,72.779 10.676,72.779 D10.1 ; U9.1 11.493,88.392 15.875,84.01 15.875,77.971 10.929,73.025 D10.1 ; C11.2 61.684,4.064 R5.2 61.265,3.899 C14.2 C12.2 C13.2 54.434,3.899 53.848,4.485 53.848,20.193 L2.2 55.372,37.338 ; U10.1 81.534,87.884 89.027,80.391 89.027,75.05 86.24,72.263 D11.1 85.721,71.751 85.721,62.099 74.93,51.308 C32.1 59.309,50.458 55.372,46.521 55.372,37.338 ; D9.2 84.082,71.382 D11.1@85.345,71.382 ; D10.1 10.922,57.023 15.875,52.07 C31.1 30.035,52.07 44.767,37.338 55.372,37.338
+12: D1.1 JDC1.1 | length 6.3
  Top Layer w1: D1.1 86.36,11.31 87.003,11.953 88.026,11.953 90.551,14.478 JDC1.1
D3V3: C18.2 C19.1 C20.2 C22.2 FB1.2 J1.2 J2.2 J3.2 J4.2 J5.2 JP1.2 R8.1 R9.1 R10.1 R11.1 R12.2 R13.2 R14.1 R21.1 R22.1 R28.2 R29.2 U4.1 U4.2 U4.3 U4.16 U6.5 U6.10 | length 341.3
  Top Layer w0.2: 1.27,31.242 4.445,31.242 5.634,32.431 5.634,32.714 5.686,32.766 U6.10 8.001,32.766 8.636,33.401 8.636,34.417 8.991,34.772 10.007,34.772 U6.5 ; U4.16 U4.1 U4.2 U4.3
  Top Layer w0.4: J3.2 2.921,84.506 6.406,87.991 ; J1.2 7.866,57.015 7.874,57.023 ; J2.2 7.866,68.064 7.874,68.072 ; 6.312,17.272 9.144,17.272 9.398,17.526 R11.1 ; C20.2 6.312,21.298 6.35,21.336 ; C22.2@7.047,21.161 7.021,21.188 C22.2 6.35,21.336 ; R8.1 20.978,14.351 22.021,13.308 22.506,13.308 R10.1 22.756,13.208 23.545,12.419 24.03,12.419 R9.1 24.28,12.319 24.38,12.419 24.38,12.569 24.803,12.992 R13.2 29.597,12.992 ; U4.16 30.84,14.235 29.597,12.992 ; R12.2 33.124,10.579 30.711,12.992 29.597,12.992 ; R29.2 47.917,85.698 48.017,85.598 50.546,85.598 ; R28.2 50.546,85.598 ; C18.2 86.195,36.199 85.586,36.807 FB1.2 85.586,43.918 90.259,48.591 C19.1 90.259,57.785 ; J5.2 90.267,57.793 90.259,57.785 ; J4.2@93.308,69.223 90.267,69.223 90.259,69.215 ; 6.35,21.336 3.937,21.336 JP1.2 0.381,24.892 0.381,28.194 1.27,29.083 1.27,31.242 R21.1 R22.1 1.27,42.037 7.874,48.641 7.874,57.023 ; 6.406,87.991 6.406,92.893 10.541,97.028 50.546,97.028 ; 6.406,87.991 6.406,71.699 7.874,70.231 7.874,68.072 ; 7.874,57.023 7.874,68.072 ; 50.546,85.598 50.546,97.028 ; 50.546,97.028 89.027,97.028 93.599,92.456 93.599,74.782 90.259,71.442 90.259,69.215 ; 90.259,57.785 90.259,69.215
  Top Layer w1: C20.2 6.312,17.272 6.312,10.238 6.898,9.652 21.463,9.652 R9.1 ; U4.1 37.16,14.225 40.082,11.303 R14.1
GND: C2.1 C3.1 C5.1 C6.1 C7.1 C9.1 C10.1 C12.1 C13.1 C14.1 C15.1 C16.1 C17.1 C18.1 C19.2 C20.1 C22.1 C23.1 C24.1 C27.2 C28.1 C29.1 C30.2 C31.2 C32.2 D3.2 J1.1 J2.1 J3.1 J4.1 J5.1 JDC1.2 JDC1.3 Q3.2 Q4.2 Q5.2 Q6.2 R3.1 R6.1 R7.2 R31.1 R34.1 R39.1 R40.1 U1.3 U2.3 U3.2 U4.8 U5.10 U6.6 U6.7 U11.2 U12.2 | length 97.3
  Top Layer w0.2: U6.7 v1(5.969,34.578) U6.6 ; C20.1 8.262,19.273 8.262,20.976 8.473,21.188 v1(8.473,21.336) ; v1(8.473,21.336) 8.599,21.463 U5.10 ; v1(58.293,12.333) 58.36,12.4 59.142,12.4 C10.1@59.37,12.628 ; C9.1 59.37,11.303 C10.1@59.37,12.628 ; C10.1 C10.1@59.37,12.628 ; C18.1 87.795,35.979 88.133,36.317 89.926,36.317 ; U3.2 90.043,36.2 89.926,36.317 ; C19.2 93.054,49.836 J5.1 ; C16.1 92.787,35.649 92.119,36.317 89.926,36.317
  Top Layer w0.8: D3.2 49.587,11.303 50.202,10.688 50.202,10.028 v2(50.292,9.938)
  Bottom Layer w1: v1(8.473,21.336) 7.803,20.666 7.803,4.008 11.055,0.756 40.38,0.756 43.491,3.867 44.221,3.867 v2(50.292,9.938) ; v2(73.876,3.937) v2(77.47,3.937)
  other v1: 1.497,1.207 4.497,1.207 7.497,1.207 46.497,1.207 49.497,1.207 52.497,1.207 55.497,1.207 58.497,1.207 67.497,1.207 70.497,1.207 73.497,1.207 82.497,1.207 85.497,1.207 88.497,1.207 91.497,1.207 94.497,1.207 97.497,1.207 2.997,4.207 5.997,4.207 11.997,4.207 14.997,4.207 17.997,4.207 23.997,4.207 26.997,4.207 47.997,4.207 50.997,4.207 65.997,4.207 68.997,4.207 71.997,4.207 80.997,4.207 86.997,4.207 89.997,4.207 92.997,4.207 95.997,4.207 1.497,7.207 4.497,7.207 10.497,7.207 28.497,7.207 31.497,7.207 49.497,7.207 52.497,7.207 55.497,7.207 67.497,7.207 70.497,7.207 82.497,7.207 85.497,7.207 88.497,7.207 91.497,7.207 94.497,7.207 97.497,7.207 2.997,10.207 29.997,10.207 92.997,10.207 95.997,10.207 1.497,13.207 4.497,13.207 19.497,13.207 40.497,13.207 43.497,13.207 46.497,13.207 49.497,13.207 52.497,13.207 67.497,13.207 70.497,13.207 79.497,13.207 94.497,13.207 2.997,16.207 14.997,16.207 44.997,16.207 47.997,16.207 50.997,16.207 59.997,16.207 68.997,16.207 77.997,16.207 92.997,16.207 1.497,19.207 4.497,19.207 16.497,19.207 22.497,19.207 25.497,19.207 28.497,19.207 88.497,19.207 97.497,19.207 11.997,22.207 50.997,22.207 59.997,22.207 68.997,22.207 86.997,22.207 89.997,22.207 92.997,22.207 95.997,22.207 4.497,25.207 7.497,25.207 16.497,25.207 34.497,25.207 61.497,25.207 76.497,25.207 91.497,25.207 94.497,25.207 97.497,25.207 2.997,28.207 5.997,28.207 8.997,28.207 14.997,28.207 35.997,28.207 38.997,28.207 74.997,28.207 77.997,28.207 92.997,28.207 95.997,28.207 10.497,31.207 34.497,31.207 37.497,31.207 43.497,31.207 79.497,31.207 82.497,31.207 91.497,31.207 94.497,31.207 97.497,31.207 41.997,34.207 47.997,34.207 56.997,34.207 59.997,34.207 62.997,34.207 65.997,34.207 68.997,34.207 71.997,34.207 80.997,34.207 95.997,34.207 4.497,37.207 19.497,37.207 22.497,37.207 37.497,37.207 40.497,37.207 58.497,37.207 61.497,37.207 64.497,37.207 67.497,37.207 70.497,37.207 76.497,37.207 79.497,37.207 97.497,37.207 11.997,40.207 20.997,40.207 26.997,40.207 38.997,40.207 47.997,40.207 50.997,40.207 56.997,40.207 59.997,40.207 62.997,40.207 65.997,40.207 68.997,40.207 71.997,40.207 77.997,40.207 80.997,40.207 95.997,40.207 7.497,43.207 13.497,43.207 46.497,43.207 49.497,43.207 58.497,43.207 61.497,43.207 64.497,43.207 67.497,43.207 70.497,43.207 76.497,43.207 79.497,43.207 97.497,43.207 8.997,46.207 14.997,46.207 20.997,46.207 26.997,46.207 29.997,46.207 38.997,46.207 41.997,46.207 47.997,46.207 50.997,46.207 56.997,46.207 62.997,46.207 65.997,46.207 68.997,46.207 71.997,46.207 77.997,46.207 89.997,46.207 92.997,46.207 95.997,46.207 1.497,49.207 10.497,49.207 37.497,49.207 55.497,49.207 61.497,49.207 64.497,49.207 67.497,49.207 70.497,49.207 76.497,49.207 79.497,49.207 85.497,49.207 88.497,49.207 94.497,49.207 97.497,49.207 5.997,52.207 8.997,52.207 11.997,52.207 56.997,52.207 77.997,52.207 86.997,52.207 95.997,52.207 10.497,55.207 19.497,55.207 22.497,55.207 31.497,55.207 37.497,55.207 55.497,55.207 58.497,55.207 61.497,55.207 64.497,55.207 67.497,55.207 70.497,55.207 76.497,55.207 85.497,55.207 88.497,55.207 91.497,55.207 94.497,55.207 8.997,58.207 14.997,58.207 20.997,58.207 29.997,58.207 32.997,58.207 38.997,58.207 59.997,58.207 62.997,58.207 65.997,58.207 68.997,58.207 71.997,58.207 77.997,58.207 86.997,58.207 13.497,61.207 19.497,61.207 28.497,61.207 31.497,61.207 37.497,61.207 61.497,61.207 64.497,61.207 67.497,61.207 70.497,61.207 76.497,61.207 79.497,61.207 88.497,61.207 91.497,61.207 8.997,64.207 26.997,64.207 29.997,64.207 32.997,64.207 38.997,64.207 65.997,64.207 68.997,64.207 71.997,64.207 80.997,64.207 92.997,64.207 13.497,67.207 22.497,67.207 28.497,67.207 31.497,67.207 64.497,67.207 67.497,67.207 70.497,67.207 73.497,67.207 88.497,67.207 91.497,67.207 8.997,70.207 14.997,70.207 17.997,70.207 20.997,70.207 26.997,70.207 29.997,70.207 32.997,70.207 38.997,70.207 65.997,70.207 68.997,70.207 77.997,70.207 80.997,70.207 13.497,73.207 16.497,73.207 19.497,73.207 28.497,73.207 31.497,73.207 34.497,73.207 37.497,73.207 61.497,73.207 64.497,73.207 67.497,73.207 73.497,73.207 76.497,73.207 79.497,73.207 2.997,76.207 17.997,76.207 23.997,76.207 26.997,76.207 29.997,76.207 32.997,76.207 38.997,76.207 59.997,76.207 62.997,76.207 71.997,76.207 74.997,76.207 77.997,76.207 7.497,79.207 22.497,79.207 25.497,79.207 28.497,79.207 31.497,79.207 34.497,79.207 37.497,79.207 46.497,79.207 49.497,79.207 58.497,79.207 61.497,79.207 67.497,79.207 70.497,79.207 73.497,79.207 91.497,79.207 97.497,79.207 8.997,82.207 17.997,82.207 20.997,82.207 23.997,82.207 26.997,82.207 29.997,82.207 32.997,82.207 47.997,82.207 65.997,82.207 68.997,82.207 71.997,82.207 89.997,82.207 7.497,85.207 19.497,85.207 22.497,85.207 25.497,85.207 28.497,85.207 31.497,85.207 34.497,85.207 40.497,85.207 43.497,85.207 58.497,85.207 61.497,85.207 67.497,85.207 70.497,85.207 73.497,85.207 88.497,85.207 91.497,85.207 97.497,85.207 8.997,88.207 14.997,88.207 17.997,88.207 20.997,88.207 26.997,88.207 29.997,88.207 32.997,88.207 47.997,88.207 65.997,88.207 68.997,88.207 71.997,88.207 83.997,88.207 10.497,91.207 13.497,91.207 16.497,91.207 28.497,91.207 31.497,91.207 34.497,91.207 40.497,91.207 43.497,91.207 46.497,91.207 49.497,91.207 52.497,91.207 58.497,91.207 61.497,91.207 64.497,91.207 67.497,91.207 70.497,91.207 73.497,91.207 76.497,91.207 79.497,91.207 82.497,91.207 97.497,91.207 14.997,94.207 17.997,94.207 26.997,94.207 29.997,94.207 32.997,94.207 35.997,94.207 47.997,94.207 53.997,94.207 65.997,94.207 68.997,94.207 71.997,94.207 74.997,94.207 77.997,94.207 80.997,94.207 83.997,94.207 97.497,97.207
  other v2: 36.258,39.446
LED0: LED6.1 U6.1 | length 15.4
  Top Layer w0.2: U6.1 10.668,32.131 13.081,32.131
  Top Layer w0.4: 13.081,32.131 17.479,32.131
  Top Layer w0.6: 17.479,32.131 21.59,32.131 22.352,31.369 22.352,30.607
  Top Layer w1: LED6.1 22.352,30.607
LED1: LED5.1 U6.2 | length 19.1
  Top Layer w0.2: U6.2 12.712,33.274 12.734,33.296 13.174,33.296 13.196,33.274 13.335,33.274
  Top Layer w0.4: 13.335,33.274 17.145,33.274
  Top Layer w0.6: 17.145,33.274 21.971,33.274
  Top Layer w0.8: 21.971,33.274 24.384,33.274 25.019,32.639
  Top Layer w1: LED5.1 25.019,32.639
LED2: R23.2 U6.3 | length 7.4
  Top Layer w0.2: U6.3 10.059,33.808 12.726,33.808 13.732,34.814 13.732,37.773 R23.2
LED3: R25.1 U6.4 | length 6.4
  Top Layer w0.2: U6.4 10.059,34.316 11.583,34.316 11.811,34.544 11.811,36.011 10.101,37.721 10.101,38.286 R25.1
NetC1_1: C1.1 L1.1 U1.2 | length 15.6
  Top Layer w0.2: C1.1 72.567,11.214 73.467,10.314 76.49,10.314 76.708,10.532 U1.2
  Top Layer w1: C1.1 72.517,21.448 L1.1
NetC1_2: C1.2 U1.4 | length 3.7
  Top Layer w0.2: C1.2 72.642,9.489 U1.4
NetC4_1: C4.1 R2.1 R3.2 U1.6 | length 6.8
  Top Layer w0.2: U1.6 77.208,9.251 77.223,9.236 77.782,9.236 79.248,7.77 R2.1
  Top Layer w0.6: R2.1 79.248,6.058 C4.1 79.286,5.842 R3.2
NetC8_1: C8.1 L2.1 U2.2 | length 15.8
  Top Layer w0.15: U2.2@60.15,9.621 U2.2 60.19,13.239 61.125,14.174 C8.1
  Top Layer w1: C8.1 63.754,14.224 65.237,15.707 65.237,21.31 L2.1
NetC8_2: C8.2 U2.4 | length 11
  Top Layer w0.2: 57.975,8.065 U2.4
  Top Layer w0.4: 56.642,9.398 57.975,8.065
  Top Layer w0.6: 56.642,9.398 56.642,10.795
  Top Layer w0.8: 56.642,10.795 56.642,13.755 57.111,14.224 C8.2
NetC11_1: C11.1 R5.1 R6.2 U2.6 | length 7.7
  Top Layer w0.2: U2.6 60.69,7.827 60.705,7.812 61.338,7.812 62.704,6.446 R6.2@63.338,6.446 ; R6.2 R6.2@63.538,6.246
  Top Layer w0.6: C11.1 63.284,5.692 63.538,5.946 R6.2
NetC17_2: C17.2 FB1.1 SW5.2 | length 15.1
  Top Layer w1: SW5.2 86.88,42.66 FB1.1 ; C17.2 v2(94.488,38.735)
  Bottom Layer w1: SW5.2 90.551,42.672 v2(94.488,38.735)
NetC21_1: C21.1 U5.6 | length 2.3
  Top Layer w0.2: U5.6 16.244,21.463 16.714,21.933 C21.1
NetC21_2: C21.2 U5.4 | length 2.3
  Top Layer w0.2: U5.4 16.244,24.003 16.714,23.533 C21.2
NetD2_2: D2.2 R7.1 | length 1.7
  Top Layer w1: D2.2 84.836,32.258 R7.1
NetD3_1: D3.1 R14.2 | length 1.6
  Top Layer w1: R14.2 D3.1
NetD4_1: D4.1 R27.2 | length 1.1
  Top Layer w0.4: D4.1 R27.2
NetD5_2: D5.2 Q3.3 R27.1 U7.2 | length 47.7
  Top Layer w1: Q3.3 v2(35.306,43.815) ; U7.2 35.917,80.875 38.354,83.312 R27.1 42.545,83.312 D5.2
  Bottom Layer w1: v2(35.306,43.815) 35.358,43.867 35.358,65.608 U7.2
NetD6_1: D6.1 R32.2 | length 1.4
  Top Layer w0.4: D6.1 R32.2
NetD7_2: D7.2 Q4.3 R32.1 U8.2 | length 58.3
  Top Layer w0.8: R32.1 51.562,82.627 51.612,82.577 53.313,82.577 D7.2 61.825,82.042 U8.2
  Top Layer w1: Q4.3 v2(74.676,44.069)
  Bottom Layer w1: v2(74.676,44.069) 74.676,63.143 U8.2
NetD8_1: D8.1 R35.2 | length 1.2
  Top Layer w1: D8.1 8.763,75.057 R35.2
NetD9_1: D9.1 R36.2 | length 1.2
  Top Layer w0.4: D9.1 R36.2
NetD10_2: D10.2 Q6.3 R35.1 U9.2 | length 62.4
  Top Layer w0.8: R35.1 8.763,77.801 8.813,77.751 10.26,77.751 D10.2 11.112,77.279 11.112,85.661 U9.2 ; Q6.3 v2(25.019,42.291)
  Bottom Layer w0.8: U9.2 11.493,85.852 25.019,72.326 v2(25.019,42.291)
NetD11_2: D11.2 Q5.3 R36.1 U10.2 | length 50.9
  Top Layer w0.8: U10.2 75.565,81.534 80.518,76.581 R36.1 83.947,76.531 84.151,76.327 D11.2
  Bottom Layer w0.8: U10.2 75.755,85.344 82.804,78.295 v2(82.804,54.229)
NetJP1_1: JP1.1 U5.12 | length 8.6
  Top Layer w0.6: JP1.1 3.81,24.003 U5.12
NetLED1_1: LED1.1 R20.2 | length 2.3
  Top Layer w0.4: R20.2 32.281,23.152 32.385,23.256 LED1.1
NetLED1_2: LED1.2 U11.3 | length 46.1
  Top Layer w1: U11.3 9.271,44.112 14.562,49.403 30.734,49.403 32.385,47.752 LED1.2
NetLED2_1: LED2.1 LED3.1 LED4.1 U12.3 | length 38.8
  Top Layer w1: U12.3 16.764,43.102 17.35,43.688 26.148,43.688 29.718,40.118 LED3.1 LED4.1 27.821,29.091 LED4.1@27.964,29.091 ; LED2.1 19.367,28.88 21.196,27.051 25.861,27.051 27.234,28.424 27.234,28.567 27.416,28.749 LED4.1@27.559,28.749
NetLED2_2: LED2.2 R15.2 | length 3.6
  Top Layer w1: LED2.2 19.304,23.484 19.89,22.898 R15.2
NetLED3_2: LED3.2 R16.2 | length 2.1
  Top Layer w0.4: LED3.2 29.718,23.252 29.818,23.152 R16.2
NetLED4_2: LED4.2 R17.2 | length 2.4
  Top Layer w0.4: LED4.2 27.559,23.129 27.663,23.025 R17.2
NetLED5_2: LED5.2 R18.2 | length 2.5
  Top Layer w0.4: LED5.2 25.527,24.714 R18.2
NetLED6_2: LED6.2 R19.2 | length 2.7
  Top Layer w0.4: LED6.2 22.415,25.273 22.978,24.711 22.978,24.647 23.114,24.511 R19.2
NetQ3_1: Q3.1 R30.2 R31.2 | length 5.3
  Top Layer w0.4: Q3.1 34.366,39.433 34.366,34.176 R30.2
NetQ4_1: Q4.1 R33.2 R34.2 | length 5.3
  Top Layer w0.6: Q4.1 73.724,34.72 73.749,34.694 R33.2
NetQ5_1: Q5.1 R37.2 R39.2 | length 5.4
  Top Layer w0.6: R37.2 81.75,46.759 81.851,46.86 Q5.1
NetQ6_1: Q6.1 R38.2 R40.2 | length 3.9
  Top Layer w0.4: Q6.1 24.066,38.227 24.079,38.214 24.079,34.43 R38.2
NetR1_1: R1.1 U1.5 | length 3
  Top Layer w0.2: U1.5 76.723,9.504 76.723,9.938 76.957,10.172 78.069,10.172 78.717,9.525 R1.1
NetR4_1: R4.1 U2.5 | length 3.5
  Top Layer w0.15: U2.5 60.23,8.105 60.23,8.504 60.449,8.724 61.992,8.724 62.715,8.001 R4.1
NetR8_2: R8.2 TP1.1 U4.13 | length 16.6
  Top Layer w0.2: R8.2 20.846,16.185 U4.13
  Top Layer w0.4: U4.13@31.415,16.18 U4.13
  Top Layer w1: TP1.1 17.38,13.062 17.38,14.713 18.834,16.167 R8.2
NetR23_1: R23.1 U12.1 | length 3
  Top Layer w0.6: R23.1 15.748,38.123 15.811,38.186 U12.1
NetR25_2: R25.2 U11.1 | length 2.8
  Top Layer w0.6: R25.2 8.217,38.504 8.318,38.605 U11.1
NetR30_1: R30.1 U4.4 | length 31.6
  Top Layer w0.4: U4.4 41.331,16.185 v1(48.768,23.622)
  Top Layer w0.6: R30.1 v1(37.592,34.163)
  Bottom Layer w0.6: v1(37.592,34.163) 48.133,23.622 v1(48.768,23.622)
NetR33_1: R33.1 U4.7 | length 46.3
  Top Layer w0.2: U4.7 37.173,18.148 38.944,18.148 38.976,18.18